# Altium PCB Misko 3 panel.PcbDoc
Units mm, origin at the board's own origin, x right, y up, seen from the top; angles counter-clockwise.
Board outline 140 x 219.21 mm, 6 copper layers (Top (LS), Mid 1 (LS), Mid 2 (GND), Mid 3 (P/HS), Mid 4 (GND), Bottom (HS)), stack 1.597 mm thick; 4 components, 0 nets, 4 pads, 0 vias.
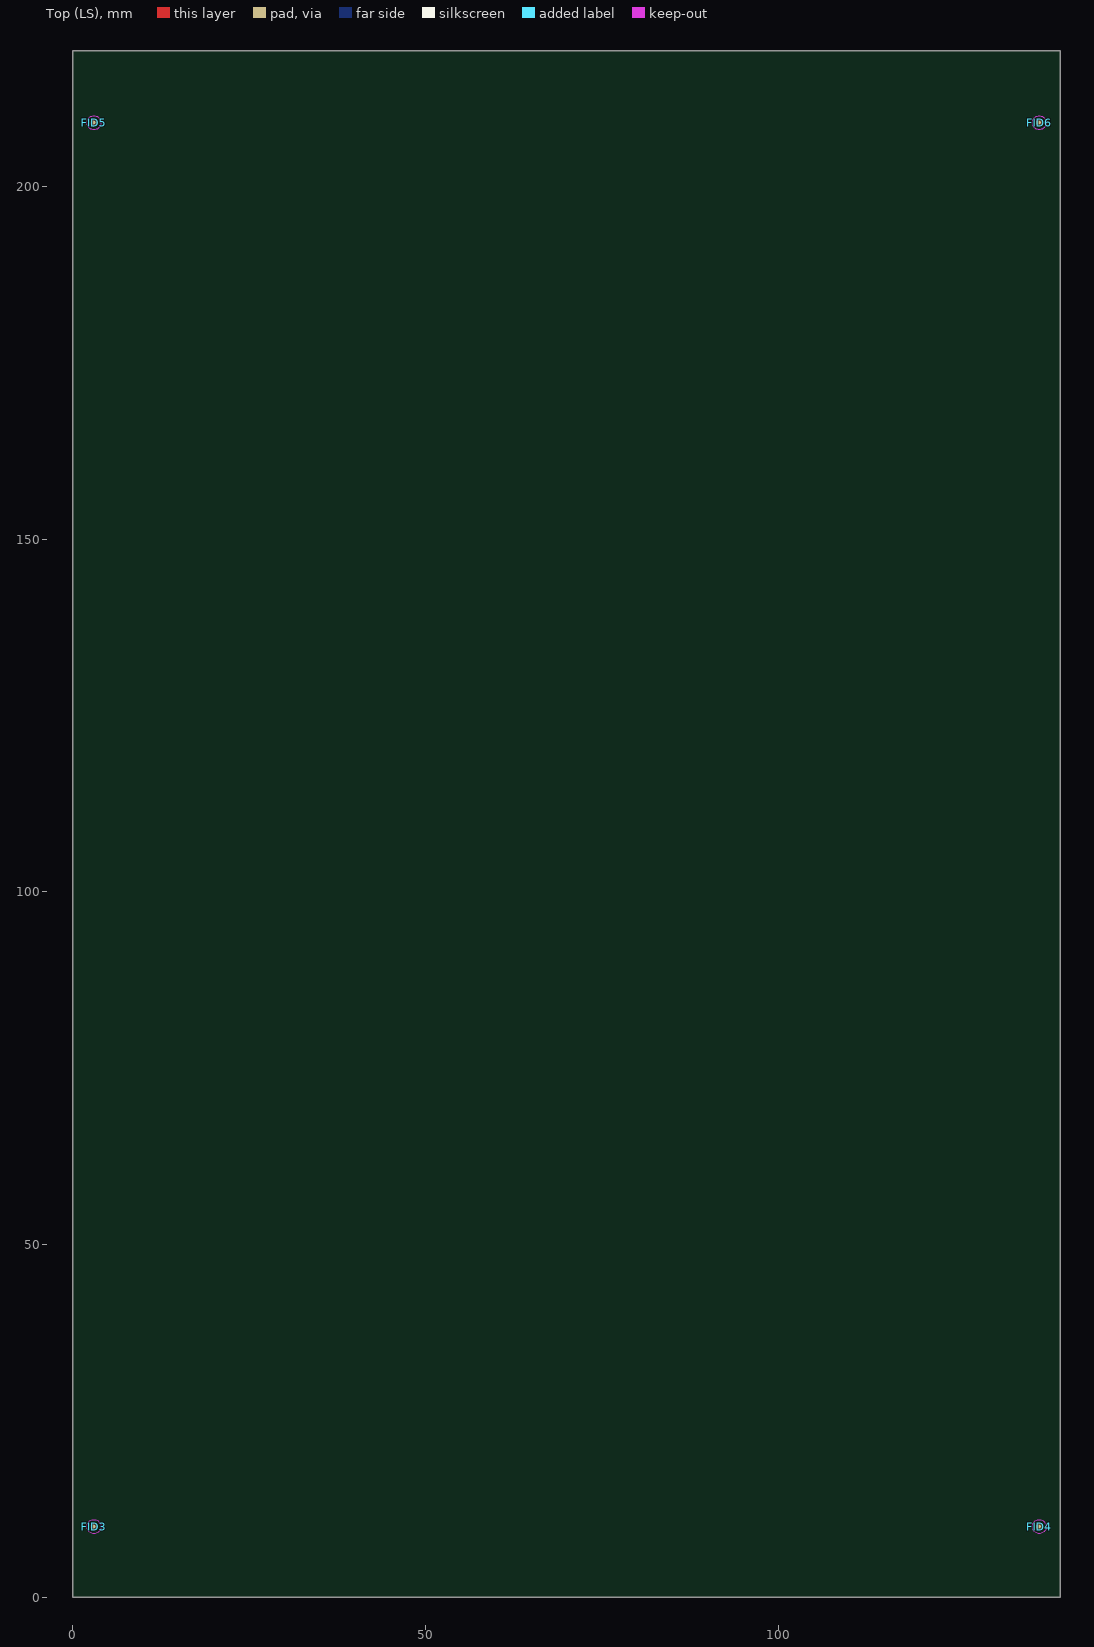
[diagram p0: Top (LS) view]
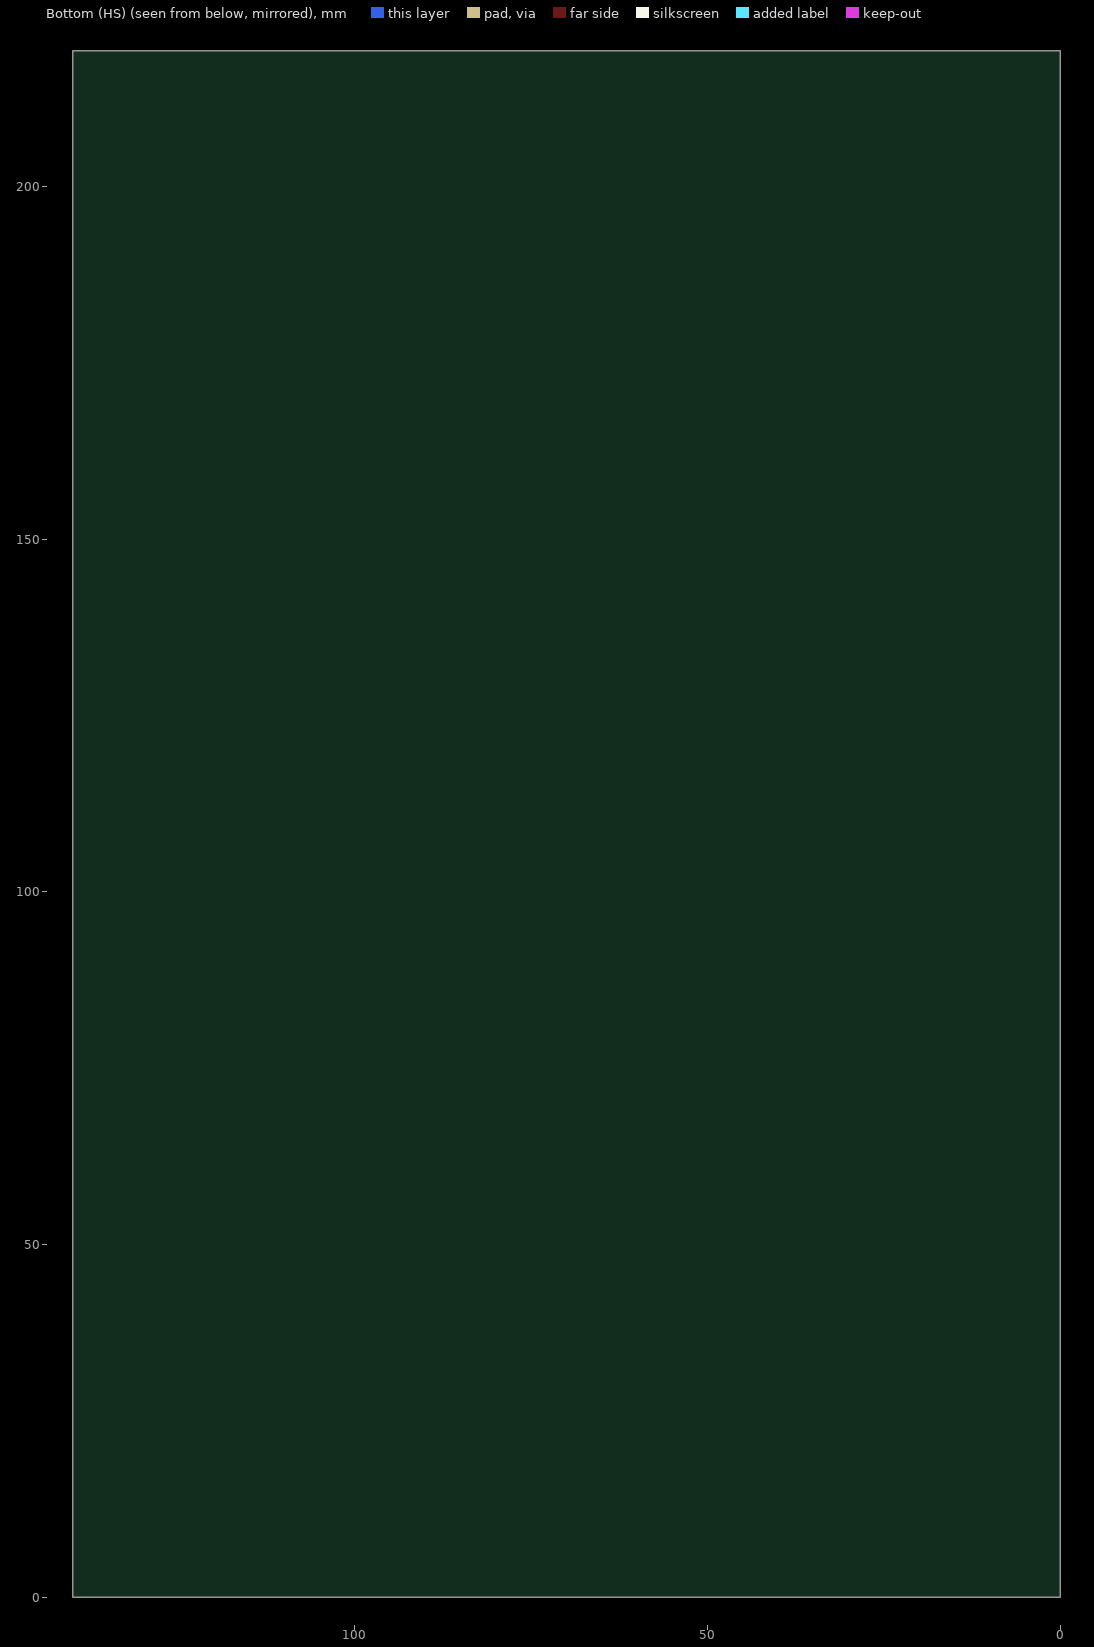
[diagram p1: Bottom (HS) view, seen from below]

## Layer stack, top to bottom
Top Mask: solder mask 0.015, Solder Resist, Dk 3.8
Top (LS): signal copper 0.035
Dielectric 1: prepreg 0.1, 2313, Dk 4.05
Mid 1 (LS): signal copper 0.0175
Core 1: core 0.565, FR-4, Dk 4.5
Mid 2 (GND): signal copper 0.0175
Dielectric 2: prepreg 0.127, 2116, Dk 4.25
Mid 3 (P/HS): signal copper 0.0175
Core 2: core 0.565, FR-4, Dk 4.5
Mid 4 (GND): signal copper 0.0175
Dielectric 3: prepreg 0.1, 2313, Dk 4.05
Bottom (HS): signal copper 0.035
Bottom Mask: solder mask 0.015, Solder Resist, Dk 3.8

## Board outline
0,0 140,0 140,219.206 0,219.206

## Design rules (kind name [scope] priority, off if disabled: settings)
Clearance [All] p1: gap=0.254 ignorepadtopadclearanceinfootprint=FALSE except(0: Arc-Hole Track-Hole SMDPad-Hole THPad-Hole Via-Hole Fill-Hole Poly-Hole Region-Hole Text-Hole)
PolygonConnect [All] p1: connectstyle=Relief reliefconductorwidth=0.254 reliefentries=4 polygonreliefangle="90 Angle" airgapwidth=0.254
RoutingVias [All] p1: holewidth=0.711 width=1.27 viastyle="Through Hole" minholewidth=0.711 minwidth=1.27 maxholewidth=0.711 maxwidth=1.27
SolderMaskExpansion [All] p1: expansion=0.102 istentingtop=FALSE
Width [All] p1: maxlimit=0.254 minlimit=0.254 preferedwidth=0.254
30 further rules are at their usual default settings.

## Components (designator, comment, footprint, x,y, rotation, side; value= is the part's Value field where it differs from the comment)
FID3 "Fiducial" Fiducial 3,10 r90 top
FID4 "Fiducial" Fiducial 137,10 r90 top (schematic designator FID3)
FID5 "Fiducial" Fiducial 3,209 r90 top (schematic designator FID3)
FID6 "Fiducial" Fiducial 137,209 r90 top (schematic designator FID3)

## Footprints (in the part's own frame and the unit in brackets; to place one, negate y for a bottom-side part, rotate by r counter-clockwise, add the part's x,y. Pads: shape width x height; smd on the part's side, far side on the other; paste and mask are expansions set on the pad)
Fiducial [mm]
  round 1 smd paste-2 mask+0.5: F(0,0)
  Top (LS) keep-out region: 0,-1 -0.383,-0.924 -0.707,-0.707 -0.924,-0.383 -1,0 -1,0 -0.924,0.383 -0.707,0.707 -0.383,0.924 0,1 0,1 0.383,0.924 0.707,0.707 0.924,0.383 1,0 1,0 0.924,-0.383 0.707,-0.707 0.383,-0.924 0,-1

## Part data
FID3 FID4 FID5 FID6: "according to IPC-7351 - is a 1mm diameter round dot with 2mm solder mask opening", max.Temperature=+125, min.Temperature=-40, Tolerance=5%, Voltage=50V

## Nets (pads, with @x,y where several pads share a name; then routed paths per layer and width w, separated by ;. In a path a pad name is that pad's centre, name@x,y a point inside that pad or via, vN(x,y) a via of type N, cw(c..) or ccw(c..) an arc to the next point about the centre after c; other vN are vias at no path point)
pads on no net: FID3.F FID4.F FID5.F FID6.F

## Silkscreen, mask and mechanical layers (free items; w line width, h text height)
Fab Notes:
  lines w0.381: 151.003,167.95 161.415,167.95 185.03,167.95 206.869,167.95 223.374,167.95 237.849,167.95 ; 151.003,170.998 161.415,170.998 185.03,170.998 206.869,170.998 223.374,170.998 237.849,170.998 ; 151.003,174.046 161.415,174.046 185.03,174.046 206.869,174.046 223.374,174.046 237.849,174.046 ; 151.003,177.094 161.415,177.094 185.03,177.094 206.869,177.094 223.374,177.094 237.849,177.094 ; 151.003,180.142 161.415,180.142 185.03,180.142 206.869,180.142 223.374,180.142 237.849,180.142 ; 151.003,183.19 161.415,183.19 185.03,183.19 206.869,183.19 223.374,183.19 237.849,183.19 ; 151.003,186.238 161.415,186.238 185.03,186.238 206.869,186.238 223.374,186.238 237.849,186.238 ; 151.003,189.286 161.415,189.286 185.03,189.286 206.869,189.286 223.374,189.286 237.849,189.286 ; 151.003,192.334 161.415,192.334 185.03,192.334 206.869,192.334 223.374,192.334 237.849,192.334 ; 151.003,195.382 161.415,195.382 185.03,195.382 206.869,195.382 223.374,195.382 237.849,195.382 ; 151.003,198.43 161.415,198.43 185.03,198.43 206.869,198.43 223.374,198.43 237.849,198.43 ; 151.003,201.478 161.415,201.478 185.03,201.478 206.869,201.478 223.374,201.478 237.849,201.478 ; 151.003,204.526 161.415,204.526 185.03,204.526 206.869,204.526 223.374,204.526 237.849,204.526 ; 151.003,207.574 161.415,207.574 185.03,207.574 206.869,207.574 223.374,207.574 237.849,207.574 ; 151.003,210.622 237.849,210.622 ; 161.415,213.67 161.415,164.902 ; 185.03,213.67 185.03,164.902 ; 206.869,213.67 206.869,164.902 ; 223.374,213.67 223.374,164.902 ; 161.415,164.902 151.003,164.902 151.003,213.67 237.849,213.67 237.849,164.902 223.374,164.902 ; 161.415,164.902 185.03,164.902 ; 185.03,164.902 206.869,164.902 ; 206.869,164.902 223.374,164.902
  text "Stencil frame: ZelFlex Z4P 584x584." at 150.843,217.5 h1.52
  text "Layer" at 152.781,211.384 h1.52
  text "Name" at 163.193,211.384 h1.52
  text "Material" at 186.808,211.384 h1.52
  text "Thickness" at 208.647,211.384 h1.52
  text "Constant" at 225.152,211.384 h1.52
  text "Top Overlay" at 163.193,208.336 h1.52
  text "Top Mask" at 163.193,205.288 h1.52
  text "Solder Resist" at 186.808,205.288 h1.52
  text "0,015mm" at 208.647,205.288 h1.52
  text "3.8" at 225.152,205.288 h1.52
  text "1" at 152.781,202.24 h1.52
  text "Top (LS)" at 163.193,202.24 h1.52
  text "0,035mm" at 208.647,202.24 h1.52
  text "Dielectric 1" at 163.193,199.192 h1.52
  text "2313" at 186.808,199.192 h1.52
  text "0,100mm" at 208.647,199.192 h1.52
  text "4.05" at 225.152,199.192 h1.52
  text "2" at 152.781,196.144 h1.52
  text "Mid 1 (LS)" at 163.193,196.144 h1.52
  text "0,018mm" at 208.647,196.144 h1.52
  text "Core 1" at 163.193,193.096 h1.52
  text "FR-4" at 186.808,193.096 h1.52
  text "0,565mm" at 208.647,193.096 h1.52
  text "4.5" at 225.152,193.096 h1.52
  text "3" at 152.781,190.048 h1.52
  text "Mid 2 (GND)" at 163.193,190.048 h1.52
  text "0,018mm" at 208.647,190.048 h1.52
  text "Dielectric 2" at 163.193,187 h1.52
  text "2116" at 186.808,187 h1.52
  text "0,127mm" at 208.647,187 h1.52
  text "4.25" at 225.152,187 h1.52
  text "4" at 152.781,183.952 h1.52
  text "Mid 3 (P/HS)" at 163.193,183.952 h1.52
  text "CF-004" at 186.808,183.952 h1.52
  text "0,018mm" at 208.647,183.952 h1.52
  text "Core 2" at 163.193,180.904 h1.52
  text "FR-4" at 186.808,180.904 h1.52
  text "0,565mm" at 208.647,180.904 h1.52
  text "4.5" at 225.152,180.904 h1.52
  text "5" at 152.781,177.856 h1.52
  text "Mid 4 (GND)" at 163.193,177.856 h1.52
  text "CF-004" at 186.808,177.856 h1.52
  text "0,018mm" at 208.647,177.856 h1.52
  text "Dielectric 3" at 163.193,174.808 h1.52
  text "2313" at 186.808,174.808 h1.52
  text "0,100mm" at 208.647,174.808 h1.52
  text "4.05" at 225.152,174.808 h1.52
  text "6" at 152.781,171.76 h1.52
  text "Bottom (HS)" at 163.193,171.76 h1.52
  text "0,035mm" at 208.647,171.76 h1.52
  text "Bottom Mask" at 163.193,168.712 h1.52
  text "Solder Resist" at 186.808,168.712 h1.52
  text "0,015mm" at 208.647,168.712 h1.52
  text "3.8" at 225.152,168.712 h1.52
  text "Bottom Overlay" at 163.193,165.664 h1.52
  text "Total board thickness:" at 152.781,162.616 h1.52
  text "1,627mm" at 208.647,162.616 h1.52
Route Tool Path:
  lines w2: 6,54.3 134.1,54.3 ; 6,109.6 134.1,109.6 ; 6,164.9 134.1,164.9
V Cut:
  lines w0.4: 6,0 6,219.206 ; 134.1,0 134.1,219.206
Panel shape:
  the board outline again, w0.4
Drill Drawing:
  circle w0.254: c153.74,133.545 r0.847
  lines w0.254: 152.893,117.458 152.893,117.881 153.317,118.305 152.893,118.728 152.893,119.151 153.317,119.151 153.74,118.728 154.163,119.151 154.587,119.151 154.587,118.728 154.163,118.305 154.587,117.881 154.587,117.458 154.163,117.458 153.74,117.881 153.317,117.458 152.893,117.458 ; 152.893,122.115 153.74,121.268 154.587,122.115 153.74,122.961 152.893,122.115 ; 152.893,125.501 153.317,125.501 153.317,125.078 154.163,125.078 154.163,125.501 154.587,125.501 154.587,126.348 154.163,126.348 154.163,126.771 153.317,126.771 153.317,126.348 152.893,126.348 152.893,125.501 ; 152.893,130.581 154.587,130.581 153.74,128.888 152.893,130.581 ; 152.893,136.508 154.587,136.508 154.587,138.201 152.893,138.201 152.893,136.508 ; 152.893,140.741 153.317,140.741 153.74,140.318 154.163,140.741 154.587,140.741 154.163,141.165 154.587,141.588 154.163,141.588 153.74,142.011 153.317,141.588 152.893,141.588 153.317,141.165 152.893,140.741 ; 152.893,144.128 153.74,144.551 154.587,144.128 154.163,144.975 154.587,145.821 153.74,145.398 152.893,145.821 153.317,144.975 152.893,144.128 ; 152.893,147.938 154.587,147.938 154.587,149.631 152.893,149.631 152.893,147.938 ; 153.232,148.277 154.248,148.277 154.248,149.293 153.232,149.293 153.232,148.277
  lines w0.381: 151.375,116.315 357.516,116.315 ; 151.375,150.605 357.516,150.605 ; 165.367,112.505 165.367,154.415 ; 182.126,112.505 182.126,154.415 ; 200.46,112.505 200.46,154.415 ; 213.309,112.505 213.309,154.415 ; 231.948,112.505 231.948,154.415 ; 265.974,112.505 265.974,154.415 ; 280.956,112.505 280.956,154.415 ; 299.899,112.505 299.899,154.415 ; 321.89,112.505 321.89,154.415 ; 151.375,112.505 357.516,112.505 357.516,154.415 151.375,154.415 151.375,112.505
  text "Symbol" at 153.661,151.748 h1.83
  text "Count" at 166.51,151.748 h1.83
  text "Hole Size" at 183.269,151.748 h1.83
  text "Plated" at 201.603,151.748 h1.83
  text "Hole Type" at 214.452,151.748 h1.83
  text "Drill Layer Pair" at 233.091,151.748 h1.83
  text "Via/Pad" at 267.117,151.748 h1.83
  text "Pad Shape" at 282.099,151.748 h1.83
  text "Hole Length" at 301.042,151.748 h1.83
  text "Routed Path Length" at 323.033,151.748 h1.83
  text "2000" at 166.51,147.938 h1.52
  text "0,20mm" at 183.269,147.938 h1.52
  text "PTH" at 201.603,147.938 h1.52
  text "Round" at 214.452,147.938 h1.52
  text "Top (LS) - Bottom (HS)" at 233.091,147.938 h1.52
  text "Via" at 267.117,147.938 h1.52
  text "Rounded" at 282.099,147.938 h1.52
  text "-" at 301.042,147.938 h1.52
  text "-" at 323.033,147.938 h1.52
  text "56" at 166.51,144.128 h1.52
  text "0,40mm" at 183.269,144.128 h1.52
  text "PTH" at 201.603,144.128 h1.52
  text "Round" at 214.452,144.128 h1.52
  text "Top (LS) - Bottom (HS)" at 233.091,144.128 h1.52
  text "Pad" at 267.117,144.128 h1.52
  text "Rounded" at 282.099,144.128 h1.52
  text "-" at 301.042,144.128 h1.52
  text "-" at 323.033,144.128 h1.52
  text "16" at 166.51,140.318 h1.52
  text "0,60mm" at 183.269,140.318 h1.52
  text "PTH" at 201.603,140.318 h1.52
  text "Slot" at 214.452,140.318 h1.52
  text "Top (LS) - Bottom (HS)" at 233.091,140.318 h1.52
  text "Pad" at 267.117,140.318 h1.52
  text "Rounded" at 282.099,140.318 h1.52
  text "1,20mm" at 301.042,140.318 h1.52
  text "0,60mm" at 323.033,140.318 h1.52
  text "200" at 166.51,136.508 h1.52
  text "0,85mm" at 183.269,136.508 h1.52
  text "PTH" at 201.603,136.508 h1.52
  text "Round" at 214.452,136.508 h1.52
  text "Top (LS) - Bottom (HS)" at 233.091,136.508 h1.52
  text "Pad" at 267.117,136.508 h1.52
  text "Octagonal" at 282.099,136.508 h1.52
  text "-" at 301.042,136.508 h1.52
  text "-" at 323.033,136.508 h1.52
  text "144" at 166.51,132.698 h1.52
  text "0,95mm" at 183.269,132.698 h1.52
  text "PTH" at 201.603,132.698 h1.52
  text "Round" at 214.452,132.698 h1.52
  text "Top (LS) - Bottom (HS)" at 233.091,132.698 h1.52
  text "Pad" at 267.117,132.698 h1.52
  text "Octagonal" at 282.099,132.698 h1.52
  text "-" at 301.042,132.698 h1.52
  text "-" at 323.033,132.698 h1.52
  text "48" at 166.51,128.888 h1.52
  text "1,00mm" at 183.269,128.888 h1.52
  text "PTH" at 201.603,128.888 h1.52
  text "Round" at 214.452,128.888 h1.52
  text "Top (LS) - Bottom (HS)" at 233.091,128.888 h1.52
  text "Pad" at 267.117,128.888 h1.52
  text "Rounded" at 282.099,128.888 h1.52
  text "-" at 301.042,128.888 h1.52
  text "-" at 323.033,128.888 h1.52
  text "8" at 166.51,125.078 h1.52
  text "1,19mm" at 183.269,125.078 h1.52
  text "NPTH" at 201.603,125.078 h1.52
  text "Round" at 214.452,125.078 h1.52
  text "Top (LS) - Bottom (HS)" at 233.091,125.078 h1.52
  text "Pad" at 267.117,125.078 h1.52
  text "Rounded" at 282.099,125.078 h1.52
  text "-" at 301.042,125.078 h1.52
  text "-" at 323.033,125.078 h1.52
  text "8" at 166.51,121.268 h1.52
  text "1,50mm" at 183.269,121.268 h1.52
  text "NPTH" at 201.603,121.268 h1.52
  text "Round" at 214.452,121.268 h1.52
  text "Top (LS) - Bottom (HS)" at 233.091,121.268 h1.52
  text "Pad" at 267.117,121.268 h1.52
  text "Rounded" at 282.099,121.268 h1.52
  text "-" at 301.042,121.268 h1.52
  text "-" at 323.033,121.268 h1.52
  text "24" at 166.51,117.458 h1.52
  text "3,20mm" at 183.269,117.458 h1.52
  text "NPTH" at 201.603,117.458 h1.52
  text "Round" at 214.452,117.458 h1.52
  text "Top (LS) - Bottom (HS)" at 233.091,117.458 h1.52
  text "Pad" at 267.117,117.458 h1.52
  text "Rounded" at 282.099,117.458 h1.52
  text "-" at 301.042,117.458 h1.52
  text "-" at 323.033,117.458 h1.52
  text "2504 Total" at 166.51,113.648 h1.52
  text "Slot definitions :" at 153.661,109.966 h1.52
  text "Routed Path Length" at 179.891,109.966 h1.52
  text "= Calculated from tool start centre position to tool end centre position." at 207.899,109.966 h1.52
  text "Hole Length" at 179.891,107.426 h1.52
  text "= Routed Path Length + Tool Size = Slot length as defined in the PCB layout" at 197.488,107.426 h1.52

## Panel: embedded boards
"Misko 3 1.1.PcbDoc" at 6,0, 4 rows x 1 columns, spacing 55.3 x 128.1, rotation 0